# Altium PCB RGBlink.PcbDoc (part 2 of 2)
Units mm, origin at the board's own origin, x right, y up, seen from the top; angles counter-clockwise.
Board outline 49.44 x 43.42 mm, 2 copper layers (Top Layer, Bottom Layer), stack 1.621 mm thick; 42 components, 36 nets, 160 pads, 110 vias.
Unrouted connection lines stored in the file: 1.
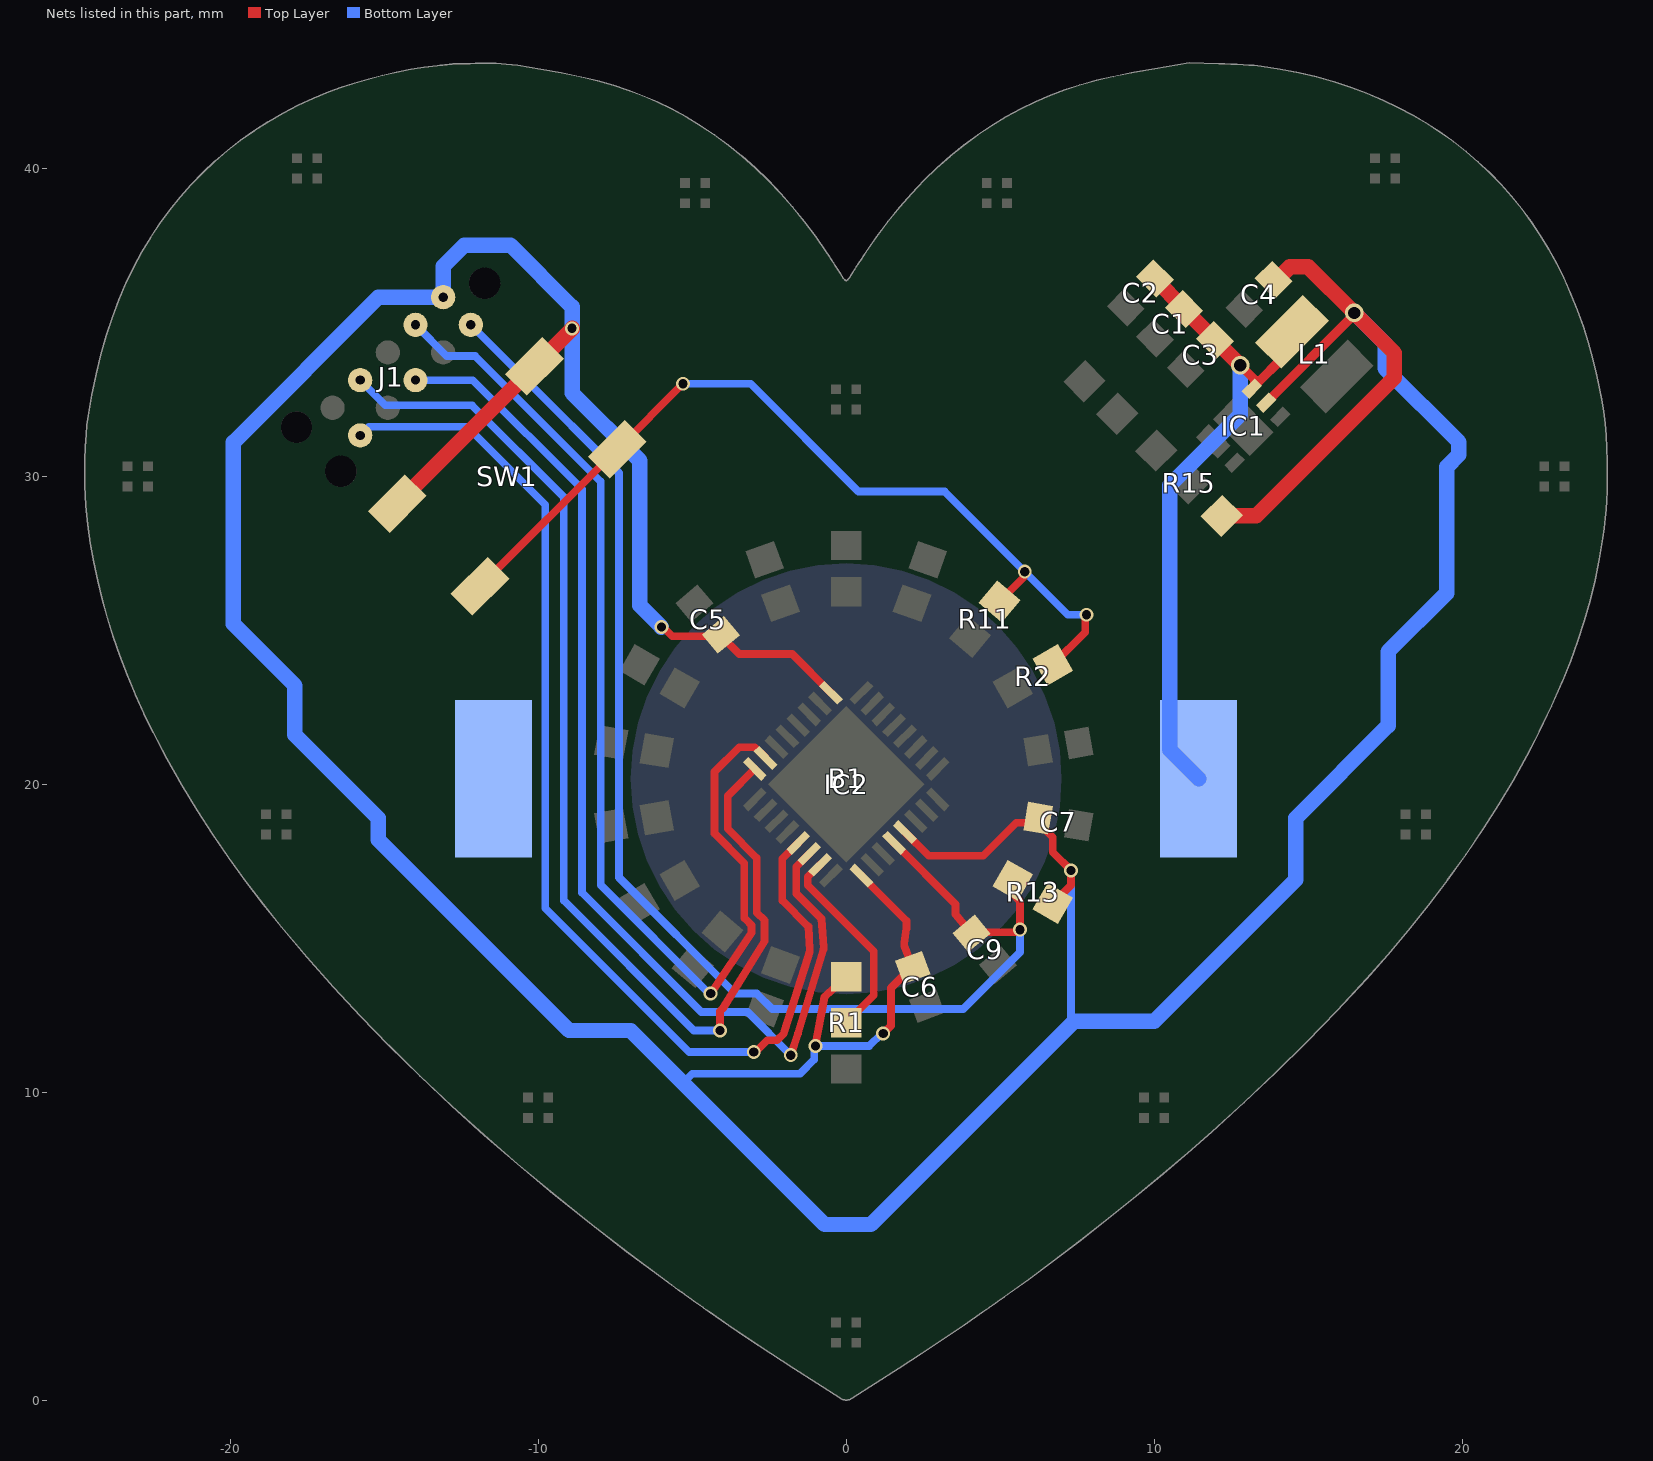
[diagram p2: the nets of this part, all layers, seen from the top]

## Via types
v1: diameter 0.45, hole 0.3, Top Layer to Bottom Layer, tented both sides, 106 vias
v2: diameter 0.6, hole 0.4, Top Layer to Bottom Layer, tented both sides, 4 vias

## Nets (pads, with @x,y where several pads share a name; then routed paths per layer and width w, separated by ;. In a path a pad name is that pad's centre, name@x,y a point inside that pad or via, vN(x,y) a via of type N, cw(c..) or ccw(c..) an arc to the next point about the centre after c; other vN are vias at no path point) (continued)
NetIC2_31: IC2.31 R1.2 | length 6.6
  Top Layer w0.25: IC2.31@-0.849,17.384 -1.244,16.988 -1.244,16.719 0.9,14.575 0.9,13.15 0.373,12.623 0.373,12.598 0.025,12.25 R1.2@0,12.25
NetR2_2: R2.2 R11.2 SW1.2 | length 28.9
  Top Layer w0.25: SW1.2@-11.888,26.423 SW1.2@-7.434,30.878 -7.422,30.878 v1(-5.3,33) ; R11.2@4.982,25.935 5.762,26.714 5.762,26.862 v1(5.8,26.9) ; R2.2@6.71,23.875 6.71,23.884 7.762,24.936 7.762,25.462 v1(7.8,25.5)
  Bottom Layer w0.25: v1(-5.3,33) -3.1,33 0.4,29.5 3.2,29.5 v1(5.8,26.9) 7.2,25.5 v1(7.8,25.5)
NRST: C9.2 IC2.4 J1.10 R13.1 | length 43.5
  Top Layer w0.25: IC2.4@1.556,18.091 3.55,16.096 3.55,15.775 3.891,15.367 C9.2@4.069,15.153 4.111,15.195 5.511,15.195 5.591,15.274 v1(5.645,15.274) 5.645,16.205 5.41,16.439 R13.1@5.41,16.875
  Bottom Layer w0.25: v1(-12.187,34.915) -10.486,33.214 -7.375,30.102 -7.375,16.969 -3.606,13.2 -2.9,13.2 -2.4,12.7 3.8,12.7 5.645,14.545 v1(5.645,15.274)
SWCLK: IC2.24 J1.4 | length 37.9
  Top Layer w0.25: v1(-4.1,12) -4.1,12.625 -4,12.725 -4,12.727 -2.65,14.904 -2.65,15.575 -2.9,15.825 -2.9,17.6 -3.85,18.55 -3.85,19.615 IC2.24@-2.97,20.495
  Bottom Layer w0.25: v1(-15.78,33.119) -14.961,32.3 -12.151,32.3 -9.175,29.324 -9.175,16.224 -4.951,12 v1(-4.1,12)
SWDIO: IC2.23 J1.2 | length 36.5
  Top Layer w0.25: v1(-4.4,13.2) -3.078,15.165 -3.078,15.166 -3.077,15.176 -3.071,15.273 -3.071,15.317 -3.071,15.42 -3.143,15.493 -3.307,15.657 -3.307,17.432 -4.275,18.4 -4.275,20.4 -3.475,21.2 -2.968,21.2 IC2.23@-2.616,20.849
  Bottom Layer w0.25: v1(-13.983,34.915) -12.969,33.9 -12.041,33.9 -7.966,29.824 -7.966,16.724 -4.441,13.2 v1(-4.4,13.2)
UART3_RX: IC2.30 J1.8 | length 36.2
  Top Layer w0.25: v1(-1.8,11.2) -1.563,11.905 -0.736,14.639 -0.732,14.694 -0.8,15.625 -1.625,16.45 -1.625,17.314 IC2.30@-1.202,17.737
  Bottom Layer w0.25: v1(-13.983,33.119) -12.122,33.119 -8.575,29.572 -8.575,16.472 -4.703,12.6 -3.2,12.6 v1(-1.8,11.2)
UART3_TX: IC2.29 J1.6 | length 37.1
  Top Layer w0.25: v1(-3,11.3) -2.946,11.3 -2.566,11.68 -2.245,11.68 -2.025,11.9 -2.007,11.958 -1.249,14.356 -1.184,14.565 -1.18,14.617 -1.225,15.375 -2.075,16.225 -2.075,17.571 IC2.29@-1.556,18.091
  Bottom Layer w0.25: v1(-15.78,31.323) -15.502,31.6 -12.3,31.6 -9.775,29.075 -9.775,15.975 -5.1,11.3 v1(-3,11.3)
VBAT: B1.+ C1.2 C2.2 C3.2 IC1.3 L1.1 | length 21.4
  Top Layer w0.3: v2@12.799,33.599 13.264,33.134 IC1.3@13.264,32.933 ; IC1.3@13.175,32.845 IC1.3@13.264,32.933 ; L1.1@14.234,34.116 14.234,33.904 IC1.3@13.264,32.933
  Top Layer w0.5: C2.2@10.024,36.424 10.024,36.399 10.974,35.449 10.999,35.449 10.999,35.399 11.949,34.449 11.999,34.449 11.999,34.4 v2(12.8,33.6)
  Bottom Layer w0.5: B1.+@11.445,20.176 10.5,21.121 10.5,29.7 12.8,32 v2(12.8,33.6)
VCC: C4.2 C5.2 C6.2 C7.2 IC1.2 IC2.1 IC2.5 IC2.17 J1.1 R1.1 R13.2 R15.3 SW1.1 | length 165
  Top Layer w0.25: v1(-6,25.1) -5.946,25.1 -5.651,24.805 -4.111,24.805 C5.2@-4.069,24.847 -4.069,24.819 -3.475,24.225 -1.75,24.225 IC2.17@-0.495,22.97 ; v1(-1,11.5) -0.703,13.09 -0.646,13.147 -0.375,13.4 R1.1@0,13.75 ; IC2.1@0.495,17.03 1.957,15.568 1.957,15.306 1.885,14.841 ccw(c2.132,14.804) 1.9,14.713 ; v1(1.2,11.9) 1.454,12.154 1.454,13.382 2.122,14.05 C6.2@2.161,14.05 2.058,14.31 1.9,14.712 ; IC2.5@1.909,18.444 2.679,17.675 4.45,17.675 5.521,18.746 6.08,18.746 C7.2@6.23,18.896 6.23,18.754 6.71,18.274 6.71,17.79 v1(7.3,17.2) 7.3,16.715 R13.2@6.71,16.125
  Top Layer w0.3: IC1.2@13.635,32.385 16.5,35.25 v2(16.5,35.3) ; C4.2@13.874,36.374 C4.2@13.982,36.374
  Top Layer w0.5: SW1.1@-14.575,29.11 SW1.1@-10.121,33.565 -8.9,34.785 v1(-8.9,34.8) ; R15.3@12.191,28.709 12.509,28.709 12.527,28.727 12.545,28.709 13.309,28.709 17.8,33.2 17.8,34 v2(16.5,35.3) 15,36.8 14.408,36.8 C4.2@13.982,36.374
  Bottom Layer w0.25: -5.3,10.3 -5,10.6 -1.5,10.6 -1.038,11.062 -1.038,11.462 v1(-1,11.5) 0.751,11.5 1.151,11.9 v1(1.2,11.9) ; v1(7.3,17.2) 7.3,12.4 7.4,12.3
  Bottom Layer w0.5: v1(-6,25.1) -6.7,25.8 -6.7,30.5 -8.9,32.7 v1(-8.9,34.8) -8.9,35.5 -10.9,37.5 -12.4,37.5 -13.085,36.815 v1(-13.085,35.813) -15.187,35.813 -19.9,31.1 -19.9,25.2 -17.9,23.2 -17.9,21.6 -15.2,18.9 -15.2,18.2 -9,12 -7,12 -5.3,10.3 -0.7,5.7 0.8,5.7 7.4,12.3 10,12.3 14.6,16.9 14.6,18.9 17.6,21.9 17.6,24.3 19.5,26.2 19.5,30.3 19.896,30.696 19.896,31.104 17.5,33.5 17.5,34.3 v2(16.5,35.3)
pads on no net: J1.7 J1.9 J1.A J1.B J1.C

## Polygon pours and split planes (outlines as drawn)
no net on Top Overlay "NONET_L-01_P-001" (none): -23.595,24.189 cw(c-4.503,31.171) -24.318,26.629 cw(c-7.017,30.595) -24.7,29.058 cw(c-16,29.814) -24.732,29.717 cw(c-2.561,29.964) -24.726,30.552 cw(c-2.757,29.97) -24.689,31.373 cw(c-17.966,30.943) -24.623,31.977 cw(c-3.337,28.67) -24.367,33.336 cw(c-8.562,29.829) -24.038,34.581 cw(c-10.15,30.317) -23.63,35.733 cw(c-11.606,30.902) -23.138,36.814 cw(c-12.309,31.262) -21.973,38.658 cw(c-12.798,31.636) -20.51,40.238 cw(c-12.745,31.578) -18.775,41.525 cw(c-12.276,30.804) -16.8,42.496 cw(c-12.61,31.668) -15.982,42.778 cw(c-11.226,27.106) -15.072,43.026 cw(c-11.221,27.087) -14.149,43.221 cw(c-12.06,31.711) -13.29,43.344 ccw(c-19.885,105.697) -13.12,43.362 ccw(c-17.899,87.399) -12.964,43.38 ccw(c-18.505,92.788) -12.833,43.394 ccw(c-13.016,44.983) -12.783,43.401 cw(c-12.717,42.95) -12.727,43.406 cw(c-11.286,-20.168) -12.491,43.411 cw(c-11.776,5.777) -12.213,43.415 cw(c-11.49,-18.645) -11.897,43.418 cw(c-11.737,19.12) -11.373,43.416 cw(c-11.434,39.351) -11.044,43.397 cw(c-11.619,37.425) -10.678,43.351 cw(c-24.383,-42.96) -9.928,43.228 cw(c-14.944,13.321) -8.608,42.977 cw(c-11.291,30.42) -7.562,42.707 cw(c-10.562,32.819) -6.633,42.376 cw(c-11.561,30.39) -5.685,41.941 cw(c-10.849,31.79) -4.281,41.094 cw(c-11.764,30.493) -2.964,40.029 cw(c-12.44,29.761) -1.75,38.759 cw(c-14.15,28.321) -0.657,37.3 cw(c-33.72,15.296) -0.496,37.057 cw(c-27.501,19.369) -0.345,36.825 cw(c-26.304,20.137) -0.22,36.628 cw(c-2.021,35.489) -0.162,36.53 ccw(c0.491,36.896) -0.122,36.467 ccw(c0.311,36.77) -0.079,36.413 ccw(c0.222,36.689) -0.039,36.375 ccw(c-0.011,36.409) -0.011,36.365 ccw(c-0.011,36.409) 0.018,36.375 ccw(c-0.243,36.689) 0.058,36.413 ccw(c-0.332,36.77) 0.101,36.467 ccw(c-0.512,36.896) 0.141,36.53 cw(c2,35.489) 0.199,36.628 cw(c26.438,20.038) 0.324,36.825 cw(c27.421,19.407) 0.475,37.057 cw(c33.853,15.195) 0.636,37.3 cw(c14.13,28.32) 1.729,38.759 cw(c12.419,29.76) 2.943,40.029 cw(c11.743,30.493) 4.26,41.094 cw(c10.828,31.79) 5.664,41.941 cw(c11.446,30.575) 6.626,42.381 cw(c10.625,32.586) 7.579,42.718 cw(c11.398,30.017) 8.656,42.993 cw(c15.082,12.578) 10.012,43.248 11.124,43.432 12.079,43.41 cw(c11.606,22.224) 12.477,43.398 cw(c11.555,20.988) 12.881,43.378 cw(c11.707,23.537) 13.236,43.353 cw(c12.959,39.752) 13.464,43.329 cw(c10.932,25.41) 14.693,43.111 cw(c11.807,29.524) 15.824,42.821 cw(c12.069,30.393) 16.892,42.447 cw(c11.95,30.093) 17.929,41.979 cw(c12.605,31.397) 20.116,40.558 cw(c12.85,31.696) 21.918,38.703 cw(c12.392,31.342) 23.296,36.445 cw(c10.096,30.267) 24.228,33.829 cw(c0.721,27.903) 24.443,32.899 cw(c12.372,30.357) 24.583,32.107 cw(c13.608,30.534) 24.666,31.342 cw(c8.819,30.184) 24.705,30.501 cw(c2.235,30.051) 24.708,29.813 cw(c12.797,29.939) 24.688,29.227 cw(c13.251,29.912) 24.639,28.652 cw(c5.412,30.779) 24.555,27.999 cw(c6.097,30.68) 23.259,23.375 cw(c-4.533,35.204) 20.693,18.593 cw(c-12.545,40.48) 16.89,13.696 cw(c-32.561,58.694) 11.865,8.728 cw(c-31.826,57.867) 10.286,7.368 cw(c-52.933,83.178) 8.497,5.911 cw(c-51.375,81.218) 6.705,4.52 cw(c-25.988,47.693) 5.118,3.364 ccw(c49.151,-59.389) 5.012,3.289 ccw(c307.576,-426.349) 4.837,3.166 ccw(c370.718,-515.916) 4.636,3.024 ccw(c340.464,-473.022) 4.435,2.882 cw(c-29.218,50.545) 3.186,2.024 cw(c-57.906,93.502) 1.699,1.048 cw(c-283.031,442.695) 0.177,0.071 cw(c-0.011,0.364) -0.011,0.016 cw(c-0.011,0.364) -0.198,0.071 cw(c283.034,442.736) -1.72,1.048 cw(c57.894,93.515) -3.207,2.024 cw(c29.21,50.564) -4.457,2.882 ccw(c-343.704,-477.583) -4.657,3.024 ccw(c-364.816,-507.516) -4.858,3.166 ccw(c-298.429,-413.341) -5.033,3.289 ccw(c-48.78,-58.832) -5.139,3.364 cw(c0.912,11.988) -5.249,3.442 cw(c54.068,85.711) -5.449,3.586 cw(c58.913,92.394) -5.681,3.755 cw(c66.352,102.604) -5.919,3.929 cw(c45.298,73.859) -10.688,7.685 cw(c32.216,58.396) -14.862,11.535 cw(c24.85,51.064) -18.358,15.389 cw(c9.266,38.197) -21.08,19.16 cw(c5.775,36.007) -22.52,21.709 cw(c-1.936,32.11)
GND on Top Layer "GND_L01_P003" (solid, remove dead copper, pour order 3): -23.585,24.173 cw(c-4.492,31.155) -24.307,26.613 cw(c-7.007,30.579) -24.69,29.042 cw(c-15.99,29.798) -24.722,29.701 cw(c-2.55,29.948) -24.715,30.536 cw(c-2.746,29.953) -24.678,31.357 cw(c-17.956,30.927) -24.612,31.96 cw(c-3.326,28.654) -24.356,33.32 cw(c-8.551,29.813) -24.027,34.565 cw(c-10.14,30.301) -23.62,35.717 cw(c-11.595,30.886) -23.127,36.797 cw(c-12.298,31.246) -21.962,38.642 cw(c-12.787,31.62) -20.5,40.222 cw(c-12.735,31.562) -18.765,41.509 cw(c-12.265,30.787) -16.79,42.48 cw(c-12.6,31.652) -15.971,42.762 cw(c-11.215,27.09) -15.061,43.01 cw(c-11.211,27.071) -14.138,43.205 cw(c-12.049,31.695) -13.28,43.328 ccw(c-19.732,104.356) -13.11,43.346 ccw(c-17.889,87.383) -12.954,43.363 ccw(c-18.495,92.772) -12.823,43.378 ccw(c-13.005,44.967) -12.773,43.385 cw(c-12.706,42.933) -12.716,43.39 cw(c-11.291,-19.452) -12.48,43.395 cw(c-11.765,5.761) -12.202,43.399 cw(c-11.483,-18.268) -11.887,43.402 cw(c-11.727,19.104) -11.362,43.399 cw(c-11.423,39.334) -11.034,43.381 cw(c-11.609,37.409) -10.668,43.335 cw(c-24.351,-42.846) -9.917,43.212 cw(c-14.933,13.304) -8.598,42.961 cw(c-11.28,30.404) -7.551,42.691 cw(c-10.552,32.803) -6.623,42.36 cw(c-11.55,30.374) -5.675,41.924 cw(c-10.838,31.774) -4.271,41.078 cw(c-11.754,30.477) -2.953,40.013 cw(c-12.429,29.745) -1.74,38.743 cw(c-14.14,28.305) -0.646,37.284 cw(c-33.71,15.28) -0.485,37.04 cw(c-27.49,19.353) -0.335,36.808 cw(c-26.293,20.121) -0.209,36.612 cw(c-2.01,35.473) -0.151,36.514 ccw(c0.501,36.879) -0.111,36.451 ccw(c0.322,36.754) -0.069,36.397 ccw(c0.233,36.673) -0.028,36.359 ccw(c0,36.393) 0,36.349 ccw(c0,36.393) 0.028,36.359 ccw(c-0.233,36.673) 0.069,36.397 ccw(c-0.321,36.754) 0.111,36.451 ccw(c-0.501,36.88) 0.151,36.514 cw(c2.01,35.473) 0.209,36.611 cw(c26.449,20.022) 0.335,36.808 cw(c27.432,19.391) 0.485,37.04 cw(c33.863,15.178) 0.646,37.284 cw(c14.14,28.304) 1.74,38.743 cw(c12.43,29.744) 2.953,40.013 cw(c11.754,30.476) 4.271,41.078 cw(c10.838,31.773) 5.674,41.924 cw(c11.456,30.559) 6.637,42.365 cw(c10.636,32.569) 7.589,42.701 cw(c11.408,30.001) 8.667,42.977 cw(c15.092,12.562) 10.023,43.232 11.134,43.416 12.09,43.394 cw(c11.617,22.208) 12.488,43.382 cw(c11.566,20.972) 12.891,43.361 cw(c11.717,23.521) 13.247,43.337 cw(c12.969,39.736) 13.474,43.312 cw(c10.943,25.393) 14.703,43.095 cw(c11.817,29.508) 15.835,42.805 cw(c12.08,30.377) 16.902,42.431 cw(c11.96,30.077) 17.94,41.963 cw(c12.616,31.381) 20.126,40.542 cw(c12.861,31.679) 21.929,38.687 cw(c12.403,31.325) 23.307,36.429 cw(c10.107,30.251) 24.239,33.813 cw(c0.731,27.887) 24.454,32.883 cw(c12.382,30.341) 24.594,32.09 cw(c13.618,30.518) 24.676,31.326 cw(c8.83,30.167) 24.716,30.485 cw(c2.245,30.035) 24.719,29.797 cw(c12.807,29.923) 24.698,29.211 cw(c13.262,29.896) 24.649,28.635 cw(c5.423,30.763) 24.566,27.983 cw(c6.107,30.664) 23.269,23.359 cw(c-4.523,35.188) 20.704,18.576 cw(c-12.534,40.464) 16.901,13.679 cw(c-32.55,58.677) 11.876,8.712 cw(c-31.815,57.85) 10.297,7.352 cw(c-52.923,83.162) 8.508,5.895 cw(c-51.364,81.202) 6.715,4.504 cw(c-25.977,47.677) 5.128,3.347 ccw(c49.162,-59.406) 5.023,3.273 ccw(c307.587,-426.366) 4.848,3.15 ccw(c370.729,-515.932) 4.647,3.008 ccw(c340.475,-473.039) 4.446,2.866 cw(c-29.207,50.529) 3.196,2.008 cw(c-57.895,93.486) 1.709,1.032 cw(c-283.02,442.679) 0.187,0.055 cw(c0,0.348) 0,0 cw(c0,0.348) -0.187,0.055 cw(c283.045,442.72) -1.709,1.032 cw(c57.904,93.498) -3.196,2.008 cw(c29.22,50.548) -4.446,2.866 ccw(c-343.694,-477.599) -4.647,3.008 ccw(c-364.806,-507.532) -4.848,3.15 ccw(c-298.418,-413.358) -5.023,3.273 ccw(c-48.77,-58.848) -5.129,3.347 cw(c0.923,11.971) -5.239,3.426 cw(c54.078,85.695) -5.438,3.57 cw(c58.923,92.378) -5.67,3.739 cw(c66.362,102.587) -5.908,3.913 cw(c45.309,73.843) -10.677,7.669 cw(c32.226,58.379) -14.852,11.518 cw(c24.861,51.048) -18.348,15.373 cw(c9.277,38.181) -21.069,19.144 cw(c5.785,35.991) -22.509,21.693 cw(c-1.926,32.094)
GND on Bottom Layer "GND_L02_P004" (solid, remove dead copper, pour order 4): -23.593,24.166 cw(c-4.501,31.149) -24.316,26.606 cw(c-7.015,30.573) -24.698,29.036 cw(c-15.998,29.792) -24.73,29.694 cw(c-2.559,29.942) -24.724,30.53 cw(c-2.755,29.947) -24.687,31.35 cw(c-17.964,30.92) -24.621,31.954 cw(c-3.335,28.648) -24.365,33.313 cw(c-8.56,29.807) -24.036,34.558 cw(c-10.148,30.295) -23.628,35.711 cw(c-11.604,30.879) -23.136,36.791 cw(c-12.307,31.24) -21.971,38.635 cw(c-12.796,31.614) -20.508,40.216 cw(c-12.743,31.556) -18.773,41.502 cw(c-12.274,30.781) -16.798,42.474 cw(c-12.608,31.646) -15.98,42.756 cw(c-11.224,27.084) -15.07,43.003 cw(c-11.219,27.065) -14.147,43.199 cw(c-12.058,31.689) -13.288,43.322 ccw(c-19.741,104.349) -13.118,43.34 ccw(c-17.897,87.376) -12.962,43.357 ccw(c-18.503,92.766) -12.831,43.372 ccw(c-13.014,44.961) -12.781,43.379 cw(c-12.715,42.927) -12.725,43.383 cw(c-11.299,-19.459) -12.489,43.388 cw(c-11.774,5.755) -12.211,43.393 cw(c-11.492,-18.274) -11.895,43.395 cw(c-11.735,19.098) -11.371,43.393 cw(c-11.432,39.328) -11.042,43.375 cw(c-11.617,37.403) -10.676,43.328 cw(c-24.36,-42.852) -9.926,43.206 cw(c-14.942,13.298) -8.606,42.954 cw(c-11.289,30.397) -7.56,42.684 cw(c-10.56,32.796) -6.631,42.353 cw(c-11.559,30.368) -5.683,41.918 cw(c-10.847,31.768) -4.279,41.072 cw(c-11.762,30.471) -2.962,40.006 cw(c-12.438,29.738) -1.748,38.736 cw(c-14.148,28.298) -0.655,37.278 cw(c-33.718,15.273) -0.494,37.034 cw(c-27.499,19.346) -0.343,36.802 cw(c-26.302,20.115) -0.218,36.605 cw(c-2.019,35.466) -0.16,36.508 ccw(c0.493,36.873) -0.12,36.444 ccw(c0.313,36.747) -0.077,36.391 ccw(c0.224,36.666) -0.037,36.353 ccw(c-0.009,36.387) -0.009,36.342 ccw(c-0.009,36.387) 0.02,36.353 ccw(c-0.241,36.666) 0.06,36.391 ccw(c-0.33,36.747) 0.103,36.444 ccw(c-0.51,36.873) 0.143,36.508 cw(c2.002,35.467) 0.201,36.605 cw(c26.44,20.016) 0.326,36.802 cw(c27.423,19.384) 0.477,37.034 cw(c33.855,15.172) 0.638,37.278 cw(c14.132,28.298) 1.731,38.736 cw(c12.421,29.738) 2.945,40.006 cw(c11.745,30.47) 4.262,41.072 cw(c10.83,31.767) 5.666,41.918 cw(c11.448,30.552) 6.628,42.358 cw(c10.627,32.563) 7.581,42.695 cw(c11.4,29.994) 8.658,42.97 cw(c15.084,12.556) 10.014,43.226 11.126,43.409 12.081,43.388 cw(c11.608,22.202) 12.479,43.375 cw(c11.557,20.965) 12.883,43.355 cw(c11.709,23.515) 13.238,43.331 cw(c12.961,39.73) 13.466,43.306 cw(c10.934,25.387) 14.695,43.089 cw(c11.809,29.502) 15.826,42.798 cw(c12.071,30.37) 16.894,42.424 cw(c11.952,30.071) 17.931,41.957 cw(c12.607,31.374) 20.118,40.536 cw(c12.852,31.673) 21.92,38.681 cw(c12.394,31.319) 23.298,36.422 cw(c10.098,30.244) 24.23,33.807 cw(c0.723,27.881) 24.445,32.877 cw(c12.374,30.334) 24.585,32.084 cw(c13.61,30.511) 24.668,31.32 cw(c8.821,30.161) 24.707,30.479 cw(c2.237,30.029) 24.71,29.79 cw(c12.799,29.917) 24.69,29.204 cw(c13.253,29.89) 24.641,28.629 cw(c5.414,30.757) 24.557,27.976 cw(c6.099,30.657) 23.261,23.353 cw(c-4.531,35.182) 20.695,18.57 cw(c-12.543,40.458) 16.892,13.673 cw(c-32.559,58.671) 11.867,8.705 cw(c-31.824,57.844) 10.288,7.346 cw(c-52.931,83.155) 8.499,5.889 cw(c-51.373,81.195) 6.707,4.498 cw(c-25.986,47.67) 5.12,3.341 ccw(c49.153,-59.412) 5.014,3.267 ccw(c307.578,-426.372) 4.839,3.143 ccw(c370.72,-515.938) 4.638,3.002 ccw(c340.466,-473.045) 4.437,2.86 cw(c-29.216,50.522) 3.188,2.002 cw(c-57.904,93.479) 1.701,1.026 cw(c-283.029,442.673) 0.179,0.049 cw(c-0.009,0.342) -0.009,-0.006 cw(c-0.009,0.341) -0.196,0.049 cw(c283.036,442.714) -1.718,1.026 cw(c57.896,93.492) -3.205,2.002 cw(c29.212,50.541) -4.455,2.86 ccw(c-343.702,-477.605) -4.655,3.002 ccw(c-364.814,-507.538) -4.856,3.143 ccw(c-298.427,-413.364) -5.031,3.267 ccw(c-48.778,-58.854) -5.137,3.341 cw(c0.914,11.965) -5.247,3.42 cw(c54.07,85.689) -5.447,3.564 cw(c58.915,92.371) -5.679,3.732 cw(c66.354,102.581) -5.917,3.906 cw(c45.3,73.837) -10.686,7.662 cw(c32.218,58.373) -14.86,11.512 cw(c24.852,51.042) -18.356,15.367 cw(c9.268,38.175) -21.078,19.137 cw(c5.777,35.984) -22.518,21.687 cw(c-1.934,32.088)
no net on Bottom Overlay "NONET_L-01_P-001" (none): -23.588,24.188 cw(c-4.495,31.171) -24.31,26.628 cw(c-7.01,30.594) -24.693,29.058 cw(c-15.993,29.814) -24.725,29.716 cw(c-2.553,29.964) -24.718,30.551 cw(c-2.749,29.969) -24.681,31.372 cw(c-17.959,30.942) -24.615,31.976 cw(c-3.329,28.669) -24.359,33.335 cw(c-8.554,29.829) -24.03,34.58 cw(c-10.142,30.316) -23.623,35.732 cw(c-11.598,30.901) -23.13,36.813 cw(c-12.301,31.262) -21.965,38.657 cw(c-12.79,31.636) -20.503,40.238 cw(c-12.738,31.577) -18.768,41.524 cw(c-12.268,30.803) -16.792,42.495 cw(c-12.603,31.668) -15.974,42.777 cw(c-11.218,27.106) -15.064,43.025 cw(c-11.214,27.086) -14.141,43.22 cw(c-12.052,31.71) -13.282,43.343 ccw(c-19.877,105.696) -13.112,43.362 ccw(c-17.891,87.398) -12.957,43.379 ccw(c-18.498,92.788) -12.826,43.394 ccw(c-13.008,44.983) -12.775,43.4 cw(c-12.709,42.949) -12.719,43.405 cw(c-11.278,-20.169) -12.483,43.41 cw(c-11.768,5.777) -12.205,43.414 cw(c-11.483,-18.645) -11.89,43.417 cw(c-11.73,19.119) -11.365,43.415 cw(c-11.426,39.35) -11.037,43.397 cw(c-11.611,37.425) -10.67,43.35 cw(c-24.376,-42.961) -9.92,43.228 cw(c-14.936,13.32) -8.601,42.976 cw(c-11.283,30.419) -7.554,42.706 cw(c-10.555,32.818) -6.626,42.375 cw(c-11.553,30.39) -5.677,41.94 cw(c-10.841,31.789) -4.274,41.093 cw(c-11.756,30.492) -2.956,40.028 cw(c-12.432,29.76) -1.743,38.758 cw(c-14.143,28.32) -0.649,37.299 cw(c-33.713,15.295) -0.488,37.056 cw(c-27.493,19.368) -0.338,36.824 cw(c-26.296,20.137) -0.212,36.627 cw(c-2.013,35.488) -0.154,36.529 ccw(c0.498,36.895) -0.114,36.466 ccw(c0.319,36.769) -0.071,36.413 ccw(c0.23,36.688) -0.031,36.374 ccw(c-0.003,36.408) -0.003,36.364 ccw(c-0.003,36.408) 0.025,36.374 ccw(c-0.236,36.688) 0.066,36.413 ccw(c-0.324,36.769) 0.108,36.466 ccw(c-0.504,36.895) 0.148,36.529 cw(c2.007,35.488) 0.206,36.627 cw(c26.446,20.038) 0.332,36.824 cw(c27.429,19.406) 0.482,37.056 cw(c33.861,15.194) 0.643,37.299 cw(c14.137,28.319) 1.737,38.758 cw(c12.427,29.759) 2.95,40.028 cw(c11.751,30.492) 4.268,41.093 cw(c10.835,31.789) 5.672,41.94 cw(c11.454,30.574) 6.634,42.38 cw(c10.633,32.585) 7.586,42.717 cw(c11.405,30.016) 8.664,42.992 cw(c15.089,12.577) 10.02,43.247 11.132,43.431 12.087,43.41 cw(c11.614,22.223) 12.485,43.397 cw(c11.563,20.987) 12.888,43.377 cw(c11.714,23.537) 13.244,43.353 cw(c12.966,39.751) 13.472,43.328 cw(c10.94,25.409) 14.701,43.111 cw(c11.814,29.523) 15.832,42.82 cw(c12.077,30.392) 16.899,42.446 cw(c11.957,30.093) 17.937,41.979 cw(c12.613,31.396) 20.123,40.557 cw(c12.858,31.695) 21.926,38.703 cw(c12.4,31.341) 23.304,36.444 cw(c10.104,30.266) 24.236,33.828 cw(c0.728,27.903) 24.451,32.899 cw(c12.379,30.356) 24.591,32.106 cw(c13.615,30.533) 24.674,31.341 cw(c8.827,30.183) 24.713,30.501 cw(c2.242,30.051) 24.716,29.812 cw(c12.804,29.939) 24.695,29.226 cw(c13.259,29.911) 24.646,28.651 cw(c5.42,30.779) 24.563,27.998 cw(c6.104,30.679) 23.266,23.374 cw(c-4.526,35.204) 20.701,18.592 cw(c-12.537,40.479) 16.898,13.695 cw(c-32.553,58.693) 11.873,8.727 cw(c-31.818,57.866) 10.294,7.367 cw(c-52.926,83.177) 8.505,5.911 cw(c-51.367,81.217) 6.712,4.52 cw(c-25.98,47.692) 5.126,3.363 ccw(c49.159,-59.39) 5.02,3.288 ccw(c307.584,-426.35) 4.845,3.165 ccw(c370.726,-515.916) 4.644,3.024 ccw(c340.472,-473.023) 4.443,2.882 cw(c-29.21,50.544) 3.193,2.023 cw(c-57.898,93.501) 1.706,1.048 cw(c-283.023,442.694) 0.185,0.07 cw(c-0.003,0.363) -0.003,0.015 cw(c-0.003,0.363) -0.19,0.07 cw(c283.042,442.736) -1.712,1.048 cw(c57.901,93.514) -3.199,2.023 cw(c29.218,50.563) -4.449,2.882 ccw(c-343.697,-477.584) -4.65,3.024 ccw(c-364.809,-507.516) -4.851,3.165 ccw(c-298.421,-413.342) -5.025,3.288 ccw(c-48.773,-58.832) -5.131,3.363 cw(c0.92,11.987) -5.242,3.441 cw(c54.075,85.71) -5.441,3.585 cw(c58.92,92.393) -5.673,3.754 cw(c66.36,102.603) -5.911,3.928 cw(c45.306,73.858) -10.68,7.684 cw(c32.223,58.395) -14.855,11.534 cw(c24.858,51.063) -18.351,15.389 cw(c9.274,38.197) -21.072,19.159 cw(c5.782,36.006) -22.512,21.708 cw(c-1.929,32.11)

## Keep-outs
Keep-Out Layer:
  the board outline again, w1

## Silkscreen, mask and mechanical layers (free items; w line width, h text height)
Bottom Overlay:
  drawing of 118 lines, arcs and shapes, not listed
  text "Made by" at 20.199,28.178 h2 r315
  text "sdani" at 17.183,25.302 h2 r315
Mechanical 1:
  circle w0.1: c-0.005,34.819 r1
  lines w0.013: -24.722,29.701 ccw(c-15.99,29.798) -24.69,29.042 ccw(c-7.007,30.579) -24.307,26.613 ccw(c-4.493,31.155) -23.585,24.173 ccw(c-1.926,32.094) -22.509,21.693 ccw(c5.785,35.99) -21.069,19.144 ccw(c9.277,38.181) -18.348,15.373 ccw(c24.86,51.048) -14.852,11.518 ccw(c32.226,58.379) -10.677,7.669 ccw(c45.309,73.844) -5.909,3.913 ccw(c66.619,102.938) -5.67,3.739 ccw(c59.042,92.54) -5.438,3.57 ccw(c53.503,84.9) -5.239,3.426 ccw(c0.938,11.992) -5.129,3.347 cw(c-49.196,-59.454) -5.023,3.273 cw(c-307.083,-425.657) -4.848,3.15 cw(c-341.6,-474.623) -4.647,3.008 cw(c-345.456,-480.096) -4.446,2.866 ccw(c29.208,50.53) -3.196,2.008 ccw(c57.879,93.46) -1.709,1.032 ccw(c282.845,442.408) -0.187,0.055 ccw(c0,0.348) 0,0 ccw(c0,0.348) 0.187,0.055 ccw(c-282.845,442.408) 1.709,1.032 ccw(c-57.879,93.46) 3.196,2.008 ccw(c-29.208,50.53) 4.446,2.866 cw(c345.456,-480.09) 4.647,3.008 cw(c341.6,-474.629) 4.848,3.15 cw(c307.083,-425.65) 5.023,3.273 cw(c49.196,-59.454) 5.128,3.347 ccw(c-25.979,47.678) 6.715,4.504 ccw(c-51.365,81.202) 8.508,5.895 ccw(c-52.921,83.16) 10.297,7.352 ccw(c-31.818,57.854) 11.876,8.712 ccw(c-32.55,58.677) 16.901,13.679 ccw(c-12.535,40.464) 20.704,18.576 ccw(c-4.523,35.188) 23.269,23.359 ccw(c6.107,30.664) 24.566,27.983 ccw(c5.417,30.764) 24.649,28.635 ccw(c13.258,29.896) 24.698,29.211 ccw(c12.808,29.923) 24.719,29.797 ccw(c2.236,30.035) 24.716,30.485 ccw(c8.826,30.167) 24.676,31.326 ccw(c13.615,30.517) 24.594,32.09 ccw(c12.378,30.34) 24.454,32.883 ccw(c0.723,27.885) 24.239,33.813 ccw(c10.107,30.251) 23.307,36.429 ccw(c12.402,31.325) 21.929,38.687 ccw(c12.861,31.679) 20.126,40.542 ccw(c12.616,31.381) 17.94,41.963 ccw(c11.959,30.076) 16.902,42.431 ccw(c12.079,30.375) 15.835,42.805 ccw(c11.817,29.506) 14.703,43.095 ccw(c10.943,25.392) 13.474,43.312 ccw(c12.969,39.731) 13.247,43.337 ccw(c11.715,23.488) 12.891,43.361 ccw(c11.566,20.974) 12.488,43.382 ccw(c11.617,22.216) 12.09,43.394 11.134,43.416 10.023,43.232 ccw(c15.093,12.559) 8.667,42.977 ccw(c11.408,30.001) 7.589,42.701 ccw(c10.636,32.569) 6.637,42.365 ccw(c11.457,30.557) 5.674,41.924 ccw(c10.838,31.773) 4.271,41.078 ccw(c11.754,30.476) 2.953,40.013 ccw(c12.43,29.744) 1.74,38.743 ccw(c14.141,28.304) 0.646,37.284 ccw(c33.968,15.109) 0.485,37.04 ccw(c27.47,19.366) 0.335,36.808 ccw(c26.465,20.012) 0.209,36.612 ccw(c2.01,35.473) 0.151,36.514 cw(c-0.501,36.88) 0.111,36.451 cw(c-0.322,36.754) 0.069,36.397 cw(c-0.233,36.672) 0.028,36.359 cw(c0,36.393) 0,36.349 cw(c0,36.393) -0.028,36.359 cw(c0.233,36.672) -0.069,36.397 cw(c0.322,36.754) -0.111,36.451 cw(c0.501,36.88) -0.151,36.514 ccw(c-2.01,35.473) -0.209,36.611 ccw(c-26.465,20.012) -0.335,36.808 ccw(c-27.47,19.366) -0.485,37.04 ccw(c-33.968,15.109) -0.646,37.284 ccw(c-14.141,28.304) -1.74,38.743 ccw(c-12.43,29.744) -2.953,40.013 ccw(c-11.754,30.476) -4.271,41.078 ccw(c-10.838,31.773) -5.675,41.924 ccw(c-11.55,30.375) -6.623,42.36 ccw(c-10.552,32.801) -7.551,42.691 ccw(c-11.281,30.402) -8.598,42.961 ccw(c-14.935,13.295) -9.917,43.212 ccw(c-24.374,-42.985) -10.668,43.335 ccw(c-11.609,37.406) -11.034,43.381 ccw(c-11.423,39.333) -11.362,43.399 ccw(c-11.727,19.081) -11.887,43.402 ccw(c-11.477,-18.917) -12.202,43.399 ccw(c-11.76,5.458) -12.48,43.395 ccw(c-11.266,-20.62) -12.716,43.39 ccw(c-12.706,42.933) -12.773,43.385 cw(c-13.005,44.966) -12.823,43.378 cw(c-18.429,92.189) -12.954,43.363 cw(c-17.863,87.147) -13.11,43.346 cw(c-19.813,105.108) -13.28,43.328 ccw(c-12.049,31.692) -14.138,43.205 ccw(c-11.211,27.072) -15.061,43.01 ccw(c-11.215,27.091) -15.971,42.762 ccw(c-12.599,31.651) -16.79,42.48 ccw(c-12.265,30.787) -18.765,41.509 ccw(c-12.735,31.562) -20.5,40.222 ccw(c-12.787,31.62) -21.962,38.642 ccw(c-12.298,31.246) -23.127,36.797 ccw(c-11.595,30.885) -23.62,35.717 ccw(c-10.14,30.301) -24.027,34.565 ccw(c-8.552,29.813) -24.356,33.32 ccw(c-3.324,28.653) -24.612,31.961 ccw(c-17.956,30.927) -24.678,31.357 ccw(c-2.746,29.953) -24.715,30.536 ccw(c-2.549,29.948) -24.722,29.701
  lines w0.254: -24.73,49.994 -24.73,-0.006 25.308,-0.006 25.308,50.032 -24.692,50.032